# Altium PCB Transmitter Suface.PcbDoc
Units mm, origin at the board's own origin, x right, y up, seen from the top; angles counter-clockwise.
Board outline 50 x 70 mm, 2 copper layers (Top Layer, Bottom Layer); 11 components, 14 nets, 31 pads, 2 vias.
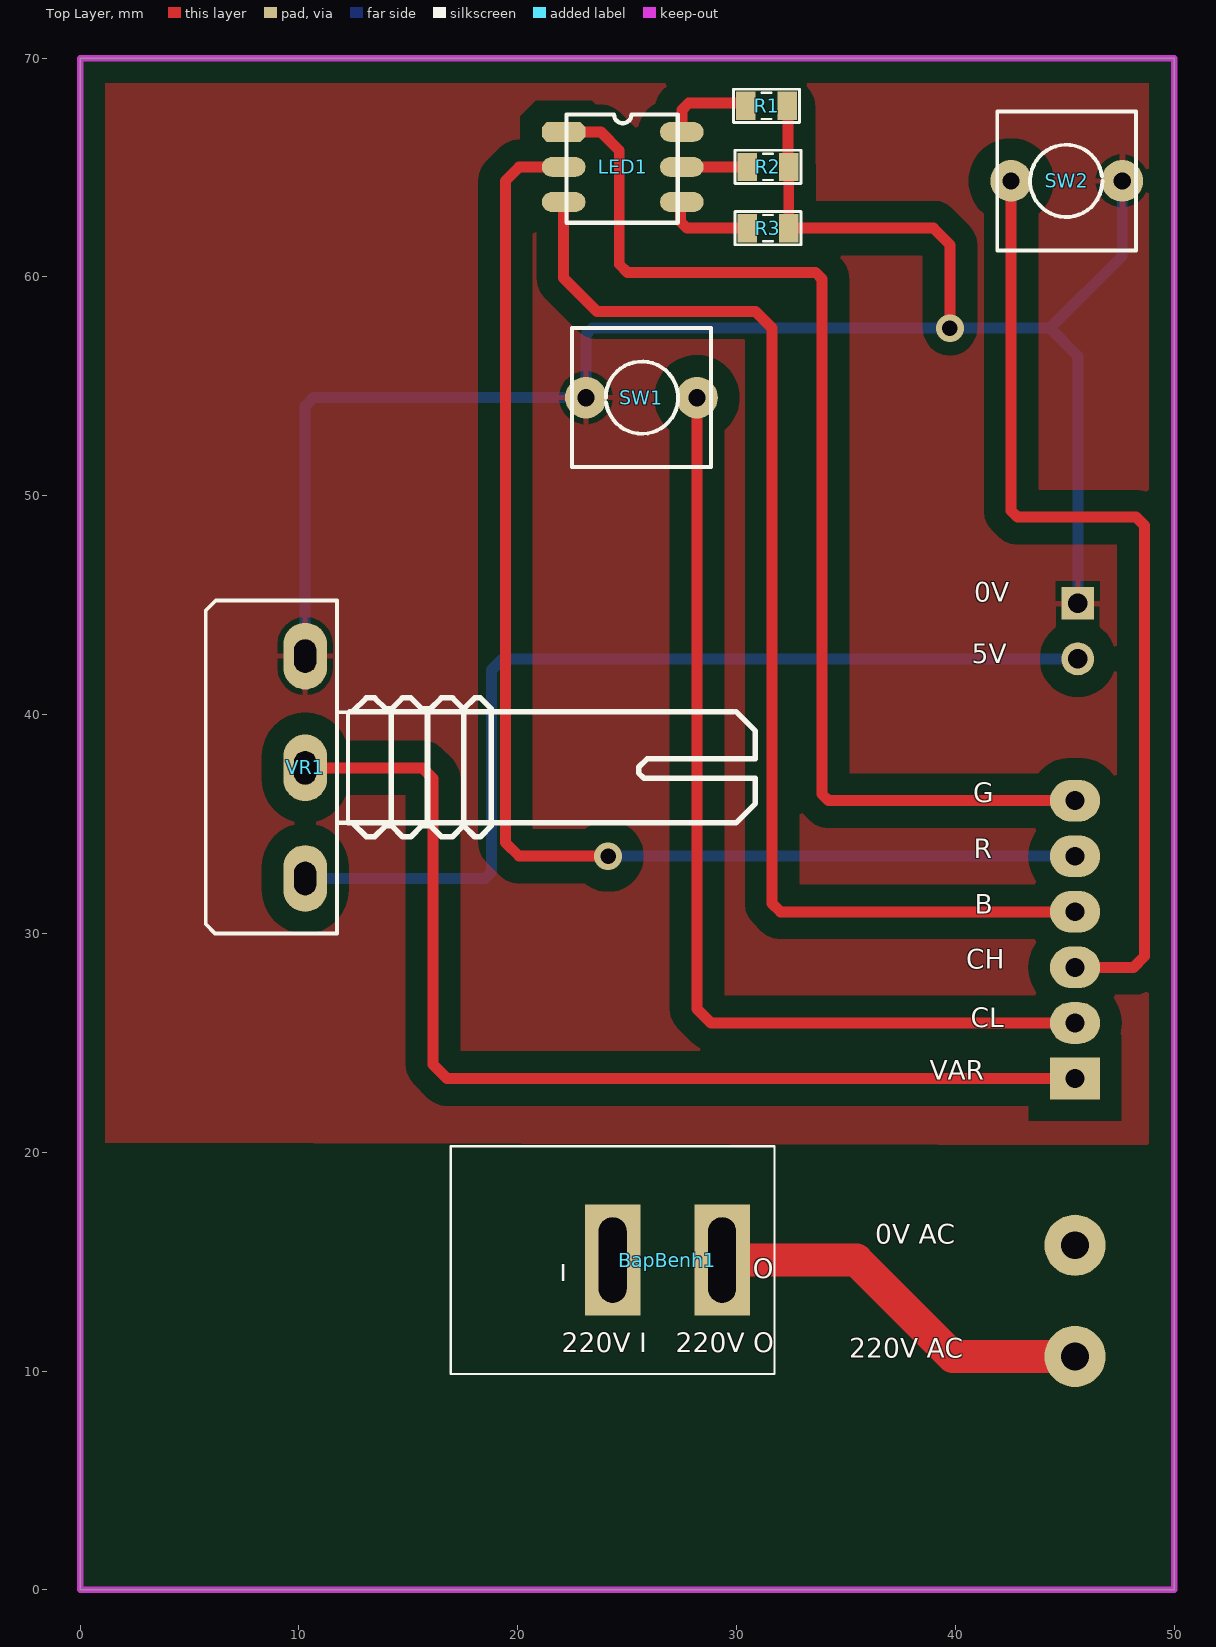
[diagram p0: Top Layer view]
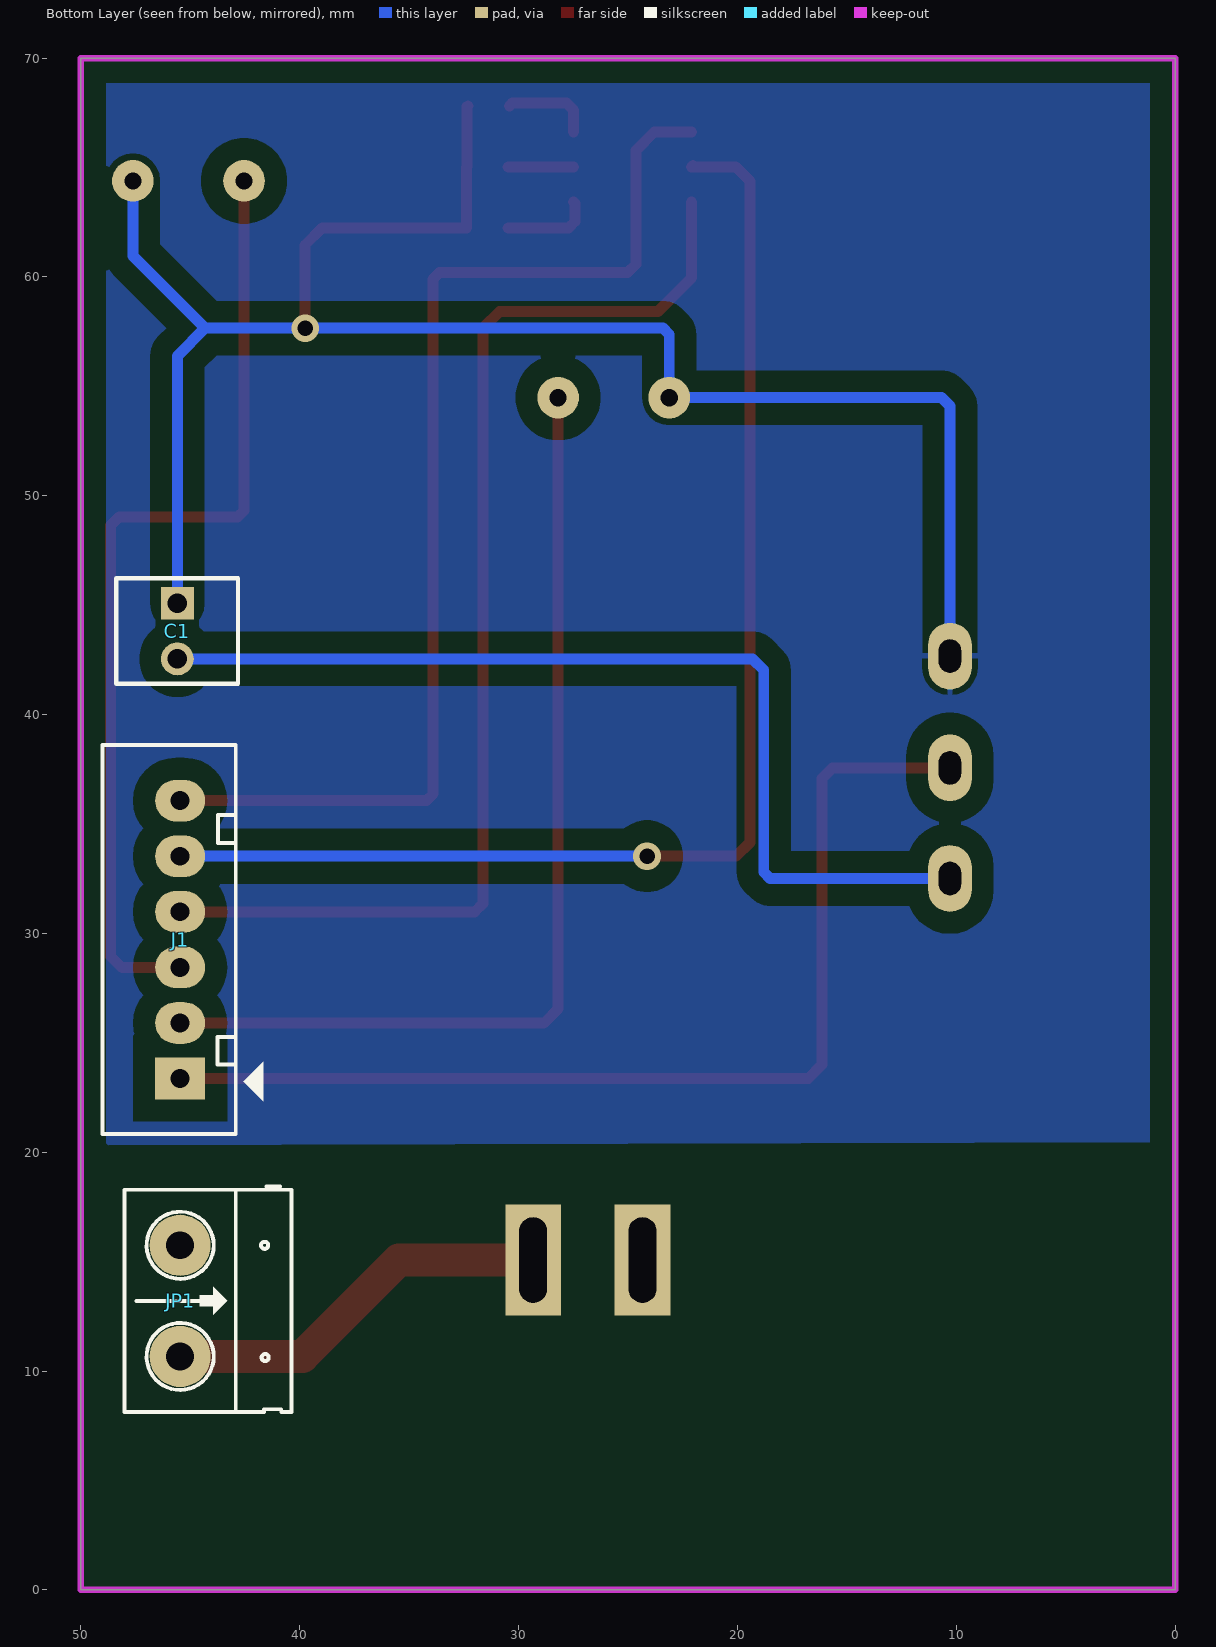
[diagram p1: Bottom Layer view, seen from below]
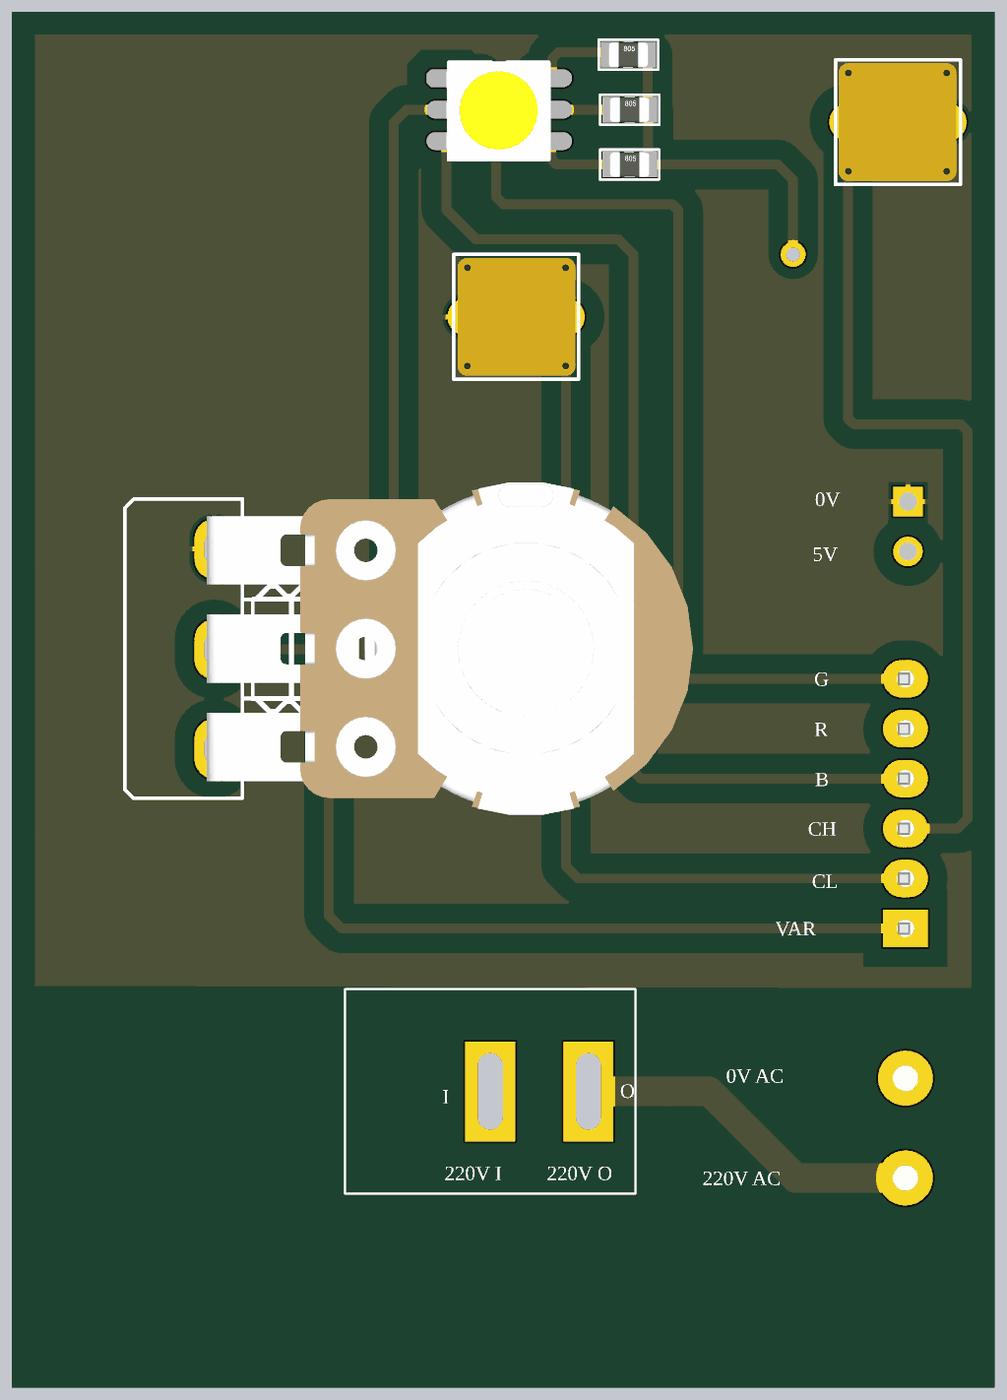
[diagram p2: 3D render of the assembled board from above, using the file's embedded part models]
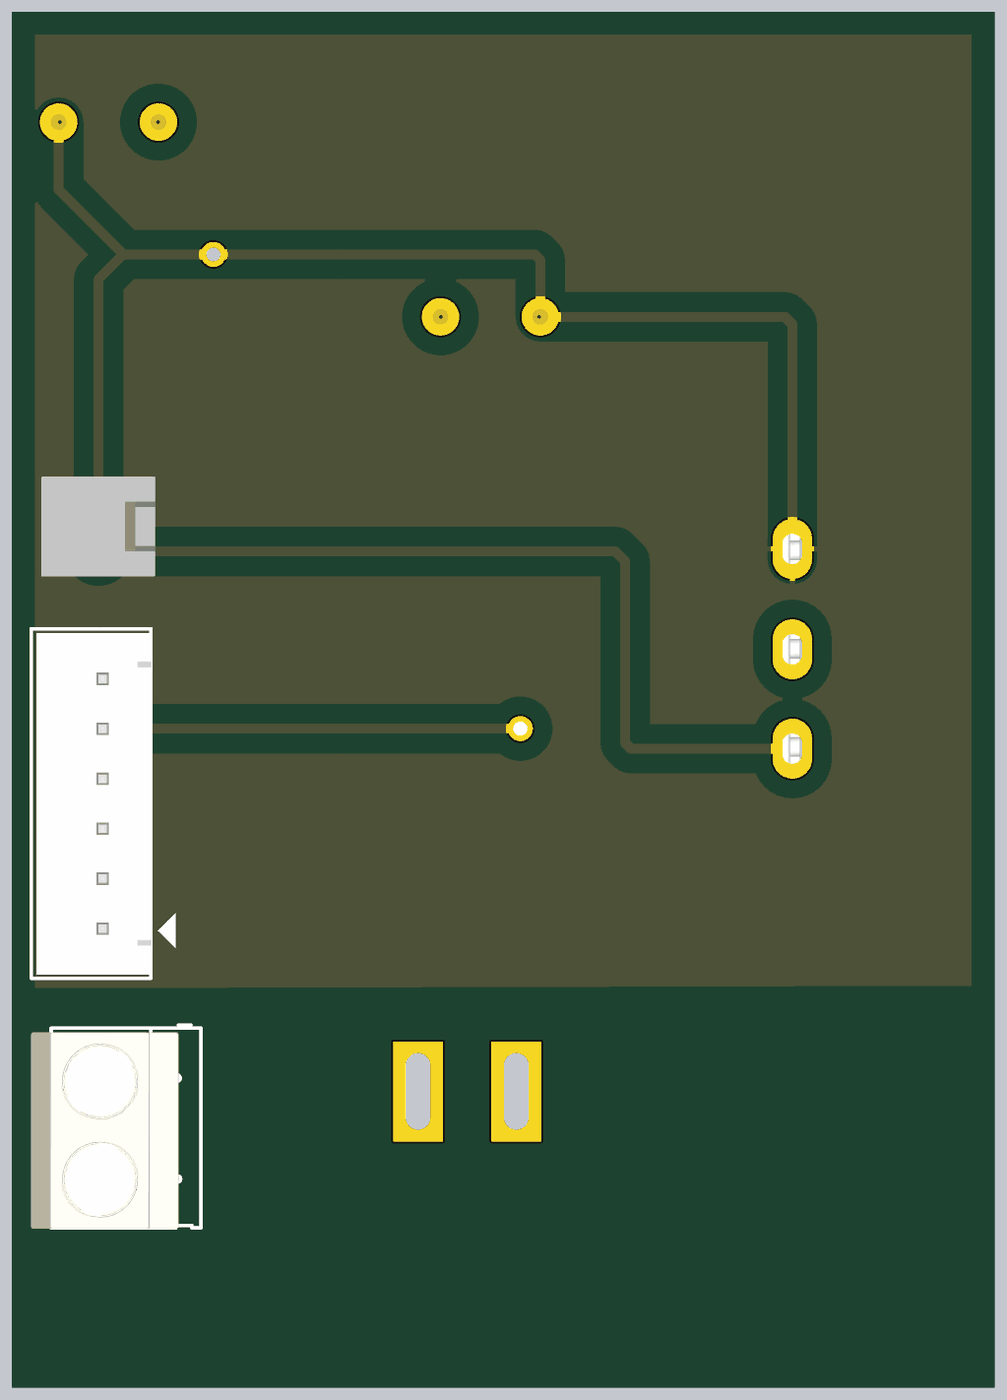
[diagram p3: 3D render of the assembled board from below, using the file's embedded part models]

## Layer stack, top to bottom
Top Solder: solder mask 0.0102, Solder Resist, Dk 3.5
Top Layer: signal copper 0.0356
Dielectric 1: dielectric 0.32, FR-4, Dk 4.8
Bottom Layer: signal copper 0.0356
Bottom Solder: solder mask 0.0102, Solder Resist, Dk 3.5

## Board outline
0,0 0,70 50,70 50,0

## Design rules (kind name [scope] priority, off if disabled: settings)
Clearance [All] p1: gap=1 ignorepadtopadclearanceinfootprint=FALSE
PolygonConnect [All] p1: connectstyle=Relief reliefconductorwidth=0.254 reliefentries=4 polygonreliefangle="90 Angle" airgapwidth=0.254
RoutingVias [All] p1: holewidth=0.711 width=1.27 viastyle="Through Hole" minholewidth=0.711 minwidth=1.27 maxholewidth=0.711 maxwidth=1.27
SolderMaskExpansion [All] p1: expansion=0.102 istentingtop=FALSE
Width [All] p1: maxlimit=1.5 minlimit=0.5 preferedwidth=0.5
30 further rules are at their usual default settings.

## Components (designator, comment, footprint, x,y, rotation, side; value= is the part's Value field where it differs from the comment)
BapBenh1 "BapBenh" "CONG TAC" 24.337,15.073 r90 top value="SW chip 2 pin"
C1 "Header2" HDR2 45.593,45.085 r270 bottom
J1 "ISP" Header6 45.466,23.368 r90 bottom
JP1 "Header 2_1" HED2 45.466,15.748 r270 bottom value="Header 2"
LED1 "LED RGB 5050" "LED RGB 5050" 24.892,65.024 r0 top
R1 "75R" RES-SMD-0805 31.369,67.818 r0 top value="R1/4W - 1K"
R2 "130R" RES-SMD-0805 31.435,65.024 r0 top value="R1/4W - 1K"
R3 "75R" RES-SMD-0805 31.435,62.23 r0 top value="R1/4W - 1K"
SW1 "SW" SW2 28.194,54.483 r180 top value="SW chip 2 pin"
SW2 "SW" SW2 42.545,64.389 r0 top value="SW chip 2 pin"
VR1 "50K" "VR-S1 - CONG" 10.287,37.592 r90 top value="Volume 50k"

## Footprints (in the part's own frame and the unit in brackets; to place one, negate y for a bottom-side part, rotate by r counter-clockwise, add the part's x,y. Pads: shape width x height; smd on the part's side, far side on the other; paste and mask are expansions set on the pad)
"CONG TAC" [mm] "bap benh 10x15mm"
  rect 5.08x2.54 hole 1.27 slot 3.9 at 0 deg: 1(0,-5) 2(0,0)
  silkscreen extent -5.2,-7.4 5.2,7.4
HDR2 [mm] "Connector; Header; 2 Position"
  rect 1.5x1.5 hole 0.9: 1(0,0)
  round 1.5 hole 0.9: 2(2.54,0)
  silkscreen extent -1.14,-2.79 3.68,2.77, body extent -1.27,-2.92 3.81,2.88, height 11.72
Header6 [mil] "CON6"
  rect 75x90 hole 34: 1(0,0)
  oval 75x90 hole 34: 2(100,0) 3(200,0) 4(300,0) 5(400,0) 6(500,0)
  silkscreen extent -100,-150 600,140, body extent -92,-101 592,129, height 284
HED2 [mil] "Header 2, 2 pin, hight 300mil, Pin to Pin 200, Colour Green"
  round 110 hole 50: 1(0,0) 2(200,0)
  silkscreen extent -106,-100 300,200, body extent -92,-140 302,155, height 394
"LED RGB 5050" [mm]
  oct 2x0.9 smd: 1(-2.794,1.6)
  oval 2x0.9 smd: 2(-2.794,0) 3(-2.794,-1.6) 4(2.606,-1.6) 5(2.606,0) 6(2.606,1.6)
  silkscreen extent -2.67,-2.54 2.41,2.4, body extent -2.78,-2.54 2.52,2.46, height 1.6
RES-SMD-0805 [mm]
  rect 0.9x1.3 smd: 1(-0.95,0) 2(0.95,0)
  silkscreen extent -1.51,-0.76 1.51,0.76, body extent -1,-0.62 1,0.63, height 0.8
SW2 [mil] "SW button 2pin, 250x 250 mil"
  round 75 hole 31: 1(0,0) 2(200,0)
  silkscreen extent -25,-125 225,125, body extent -19,-118 217,118, height 177
"VR-S1 - CONG" [mil]
  oval 120x78.74 hole 40 slot 60 at 0 deg: 1(-200,0) 2(-1,0) 3(200,0)
  silkscreen extent -299,-810 300,179, body extent -334,-959 335,15, height 1020

## Part data
C1: "Header IDC, 2 x 1 Pin Vertical 2.54mm Pitch (Non-Boxed, Male)", Manufacturer="W¨¹rth Elektronik eiSos GmbH", PartNo=613002143121, ComponentLink1 Description=Manufacturer, ComponentLink1URL=http://www.we-online.com, ComponentLink2 Description=Datasheet, ComponentLink2URL=http://katalog.we-online.de/em/datasheet/6130xx143121.pdf, Created by="Karrer Zheng", Created Date="29 March 2013", NoPins=02
J1: library part "JUMP 6", "JUMP DON DUC 2.54"
JP1: "Header, 2-Pin", Manufacturer="Generic Components", Class=Connector
LED1: Color="Red & Green & Blue", Manufacturer="Würth Elektronik eiSos GmbH", PartNo=150141M173100, ComponentLink1Description=Manufacturer, ComponentLink1URL=http://www.we-online.de, ComponentLink2Description=Datasheet, ComponentLink2URL=http://katalog.we-online.com/led/datasheet/150141M173100.pdf, Created by="Christin Otto", Created Date="June 2013"
R1 R2 R3: library part "RES 1/4W", "Tro 1/4W"
SW1 SW2: library part SW2, "Switch button 2 pin"
VR1: library part VR-S, "Var Resistor"

## Via types
v1: diameter 1.27, hole 0.711, Top Layer to Bottom Layer, 2 vias

## Nets (pads, with @x,y where several pads share a name; then routed paths per layer and width w, separated by ;. In a path a pad name is that pad's centre, name@x,y a point inside that pad or via, vN(x,y) a via of type N, cw(c..) or ccw(c..) an arc to the next point about the centre after c; other vN are vias at no path point)
"220V IN": BapBenh1.2
"220V OUT": BapBenh1.1 JP1.2 | length 18
  Top Layer w1.5: BapBenh1.1 35.473,15.073 39.878,10.668 JP1.2
BLUE: J1.4 LED1.3 | length 54.2
  Top Layer w0.5: LED1.3 22.098,59.944 23.622,58.42 30.861,58.42 31.623,57.658 31.623,31.369 32.004,30.988 J1.4
CHANNEL: J1.3 SW2.1 | length 44.5
  Top Layer w0.5: SW2.1 42.545,49.315 42.838,49.022 48.26,49.022 48.641,48.641 48.641,28.956 48.133,28.448 J1.3
COLOR: J1.2 SW1.1 | length 45.5
  Top Layer w0.5: SW1.1 28.194,26.543 28.829,25.908 J1.2
GND: C1.1 R1.2 R2.2 R3.2 SW1.2 SW2.2 VR1.3 | length 86.9
  Top Layer w0.5: R1.2 32.352,67.785 32.352,65.057 R2.2 R3.2 38.989,62.23 39.751,61.468 v1(39.751,57.658)
  Bottom Layer w0.5: VR1.3 10.287,54.102 10.668,54.483 SW1.2 23.114,57.365 23.407,57.658 v1(39.751,57.658) 44.323,57.658 ; C1.1 45.593,56.388 44.323,57.658 ; SW2.2 47.625,60.96 44.323,57.658
"GND AC": JP1.1
GREEN: J1.6 LED1.1 | length 52.9
  Top Layer w0.5: LED1.1 23.8,66.624 24.638,65.786 24.638,60.579 25.019,60.198 33.616,60.198 33.909,59.905 33.909,36.361 34.202,36.068 J1.6
NetLED1_4: LED1.4 R3.1 | length 4.1
  Top Layer w0.5: LED1.4 27.432,63.358 27.432,62.523 27.725,62.23 R3.1
NetLED1_5: LED1.5 R2.1 | length 3
  Top Layer w0.5: LED1.5 R2.1
NetLED1_6: LED1.6 R1.1 | length 4.1
  Top Layer w0.5: LED1.6 27.498,67.63 27.813,67.945 30.292,67.945 R1.1
RED: J1.5 LED1.2 | length 59.5
  Top Layer w0.5: LED1.2@22.034,65.087 LED1.2 20.066,65.024 19.431,64.389 19.431,34.163 20.066,33.528 v1(24.13,33.528)
  Bottom Layer w0.5: v1(24.13,33.528) J1.5
VAR: J1.1 VR1.2 | length 48.7
  Top Layer w0.5: VR1.2 15.646,37.567 16.129,37.084 16.129,24.003 16.764,23.368 J1.1
VCC: C1.2 VR1.1 | length 44.9
  Bottom Layer w0.5: VR1.1 18.503,32.512 18.796,32.805 18.796,42.037 19.304,42.545 C1.2

## Polygon pours and split planes (outlines as drawn)
GND on Bottom Layer "GND_L02_P001" (solid, pour order 1): 0,69.977 0,0 50.038,0 50.038,69.977
GND on Top Layer "GND_L01_P002" (solid, pour order 2): 0,69.977 0,0 50.038,0 50.038,69.977

## Keep-outs
Keep-Out Layer:
  the board outline again, w0.3

## Other copper
Top Layer:
  pour cut-out: 0,20.447 50.038,20.32 50.038,0 0,0
Bottom Layer:
  pour cut-out: 48.768,20.32 1.27,20.447 0,20.447 50.038,20.32 50.038,0 0,0 0,20.447

## Silkscreen, mask and mechanical layers (free items; w line width, h text height)
Top Overlay:
  text "0V" at 40.863,44.852 h1.5
  text "5V" at 40.744,42.058 h1.5
  text "G" at 40.821,35.708 h1.5
  text "R" at 40.831,33.147 h1.5
  text "B" at 40.873,30.607 h1.5
  text "CH" at 40.503,28.088 h1.5
  text "CL" at 40.705,25.421 h1.5
  text "VAR" at 38.832,23.008 h1.5
  text "0V AC" at 36.34,15.515 h1.5
  text "220V I" at 22.01,10.562 h1.5
  text "220V O" at 27.217,10.562 h1.5
  text "220V AC" at 35.146,10.308 h1.5

## Text inside footprints (layer, text, board x,y; h text height)
BapBenh1: Top Overlay "I" at 22.253,15.148 h1.5 r180; Top Overlay "O" at 31.7,15.428 h1.5 r180